# Altium PCB PCB.PcbDoc
Units mm, origin at the board's own origin, x right, y up, seen from the top; angles counter-clockwise.
Board outline 152.4 x 101.6 mm, 2 copper layers (Top Layer, Bottom Layer); 16 components, 10 nets, 35 pads, 0 vias.
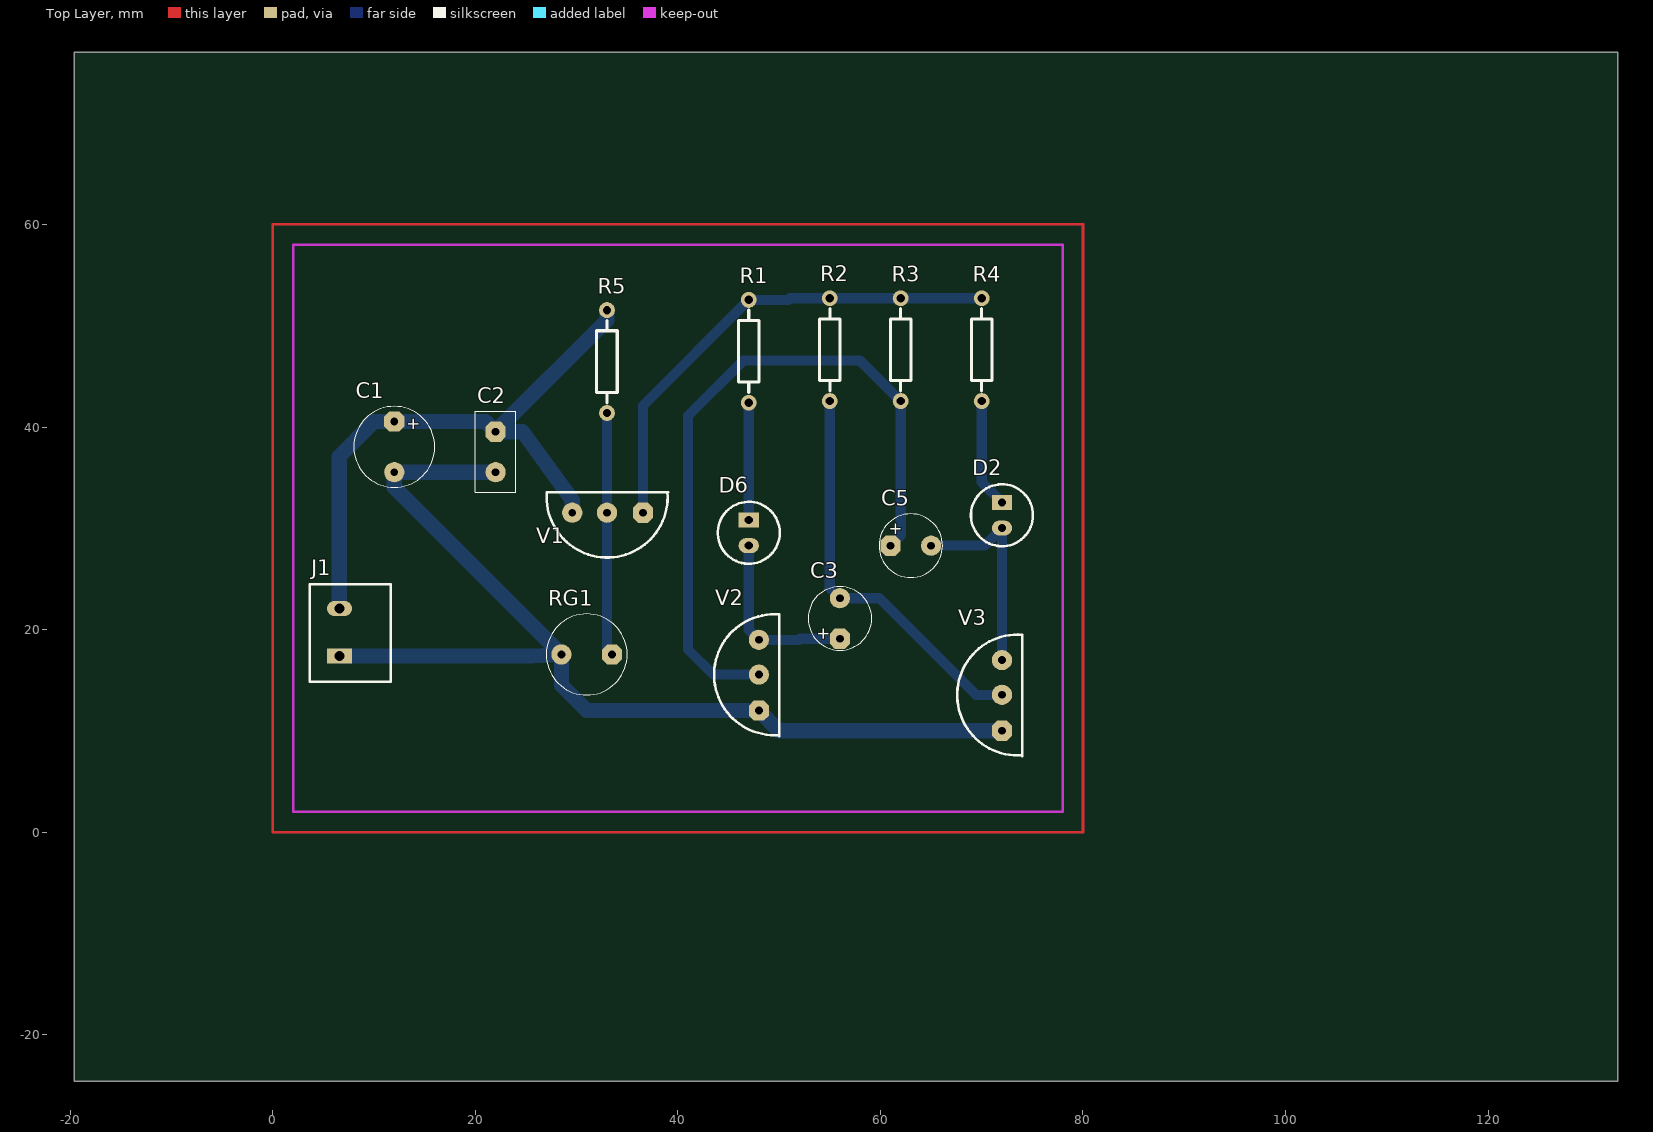
[diagram p0: Top Layer view]
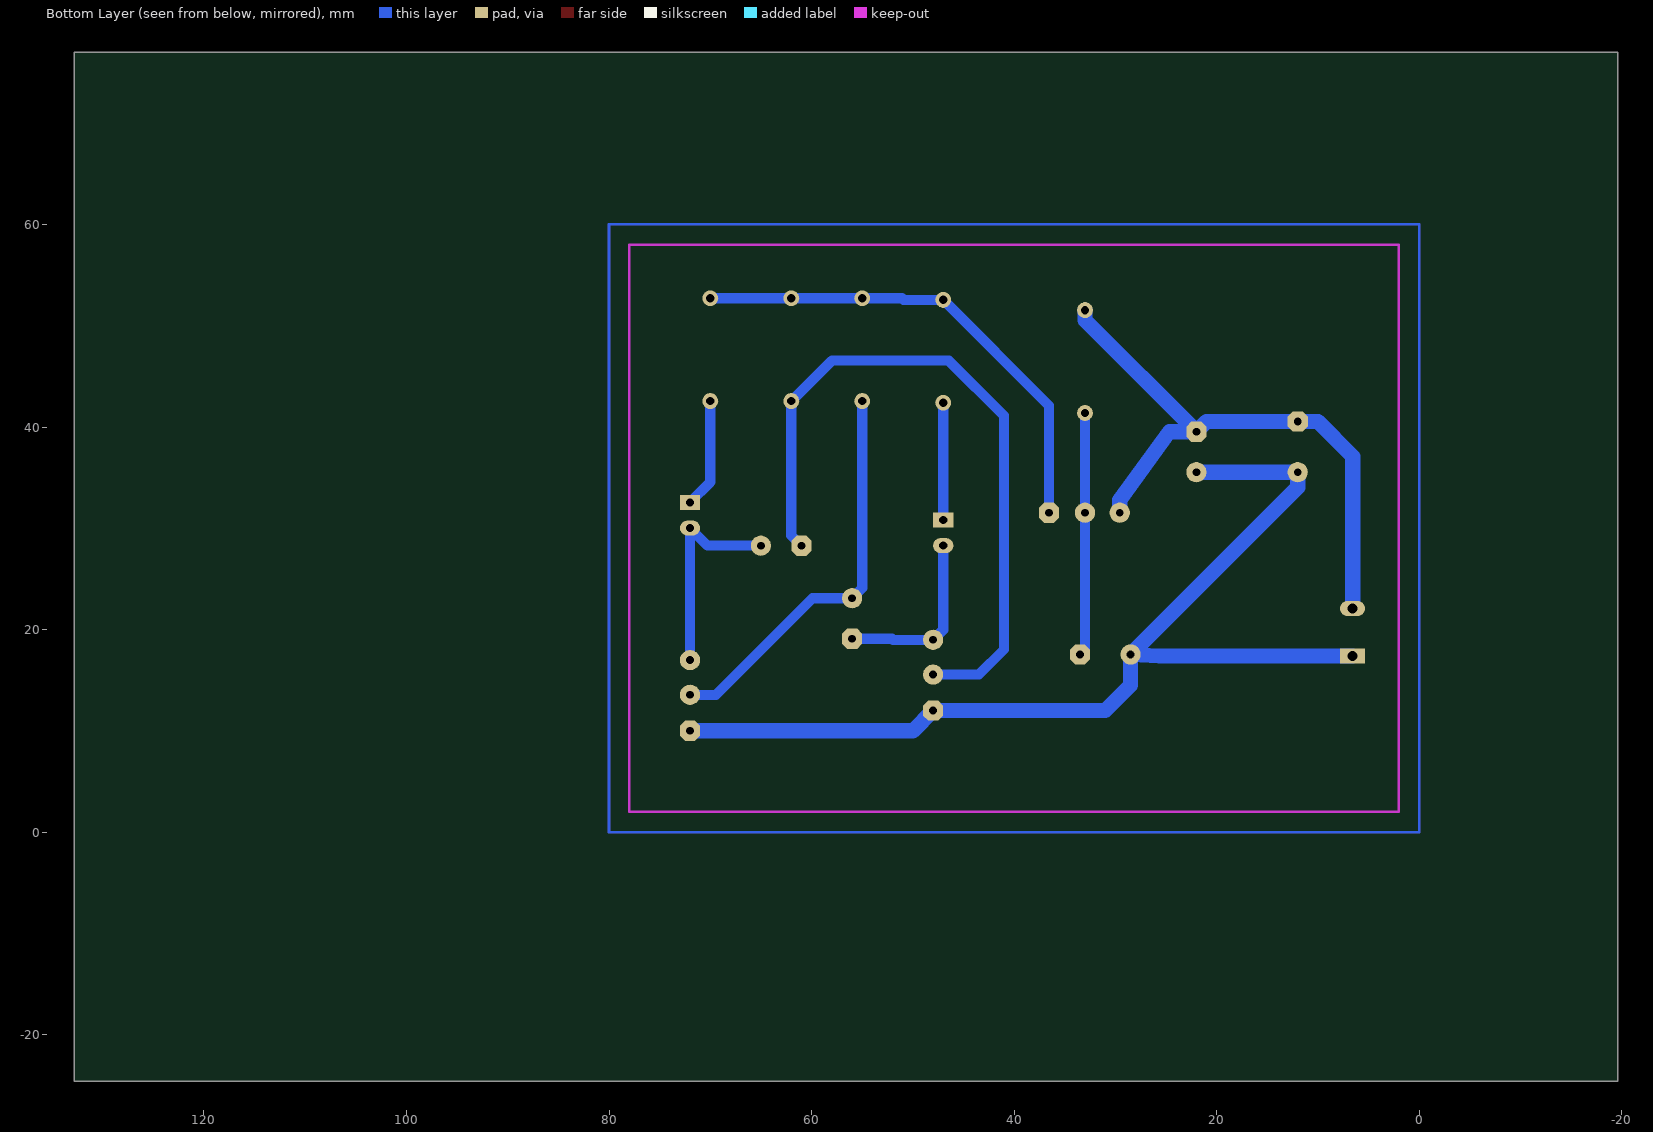
[diagram p1: Bottom Layer view, seen from below]

## Layer stack, top to bottom
Top Solder: solder mask 0.0102, Solder Resist, Dk 3.5
Top Layer: signal copper 0.0356
Dielectric 1: dielectric 0.32, FR-4, Dk 4.8
Bottom Layer: signal copper 0.0356
Bottom Solder: solder mask 0.0102, Solder Resist, Dk 3.5

## Board outline
-19.6,-24.6 132.8,-24.6 132.8,77 -19.6,77

## Design rules (kind name [scope] priority, off if disabled: settings)
Clearance [All] p1: gap=0.254 ignorepadtopadclearanceinfootprint=FALSE except(0: Arc-Hole Track-Hole SMDPad-Hole THPad-Hole Via-Hole Fill-Hole Poly-Hole Region-Hole Text-Hole)
PolygonConnect [All] p1: connectstyle=Relief reliefconductorwidth=0.254 reliefentries=4 polygonreliefangle="90 Angle" airgapwidth=0.254
RoutingVias [All] p1: holewidth=0.711 width=1.27 viastyle="Through Hole" minholewidth=0.711 minwidth=1.27 maxholewidth=0.711 maxwidth=1.27
SolderMaskExpansion [All] p1: expansion=0.102
Width Width_1 [InNet('GND')] p1: maxlimit=1.5 minlimit=0.254 preferedwidth=1.5 toplayer_maxwidth=0.254 toplayer_prefwidth=0.254 bottomlayer_minwidth=1.5 minimp=50.000000 maximp=50.000000 favimp=50.000000
Width Vin [InNet('VIN')] p2: maxlimit=1.5 minlimit=0.254 preferedwidth=1.5 toplayer_maxwidth=0.254 toplayer_prefwidth=0.254 bottomlayer_minwidth=1.5 minimp=50.000000 maximp=50.000000 favimp=50.000000
Width VOUT [InNet('VOUT')] p3: maxlimit=1.5 minlimit=1 preferedwidth=1.5 toplayer_maxwidth=1 toplayer_prefwidth=1 bottomlayer_minwidth=1.5 minimp=50.000000 maximp=50.000000 favimp=50.000000 checkconnectedcopper=TRUE
Width [All] p4: maxlimit=1 minlimit=1 preferedwidth=1 minimp=50.000000 maximp=50.000000 favimp=50.000000
30 further rules are at their usual default settings.

## Components (designator, comment, footprint, x,y, rotation, side; value= is the part's Value field where it differs from the comment)
C1 "100uf" RB5/8 12,40.54 r270 top
C2 "0.1uf" RAD4 22,39.54 r270 top
C3 "10uF/25V" RB4/5 56,19.096 r90 top
C5 "10uF/25V" RB4/5 61,28.286 r0 top
D2 "LED0" LED-0 72,31.286 r270 top
D6 "LED0" LED-0 47,29.556 r270 top
J1 "CON2" HDR1X2 9,19.54 r90 top
R1 "510" AXIAL0.4 47,42.396 r90 top
R2 "33k" AXIAL0.4 55,42.556 r90 top
R3 "33k" AXIAL0.4 62,42.556 r90 top
R4 "510" AXIAL0.4 70,42.556 r90 top
R5 "100k" AXIAL0.4 33,41.38 r90 top
RG1 "RG" RB5/8-D 31,17.54 r180 top
V1 "9013" T3-111 36.556,31.54 r180 top
V2 "9013" T3-111 48,12 r90 top
V3 "9013" T3-111 72,10 r90 top

## Footprints (in the part's own frame and the unit in brackets; to place one, negate y for a bottom-side part, rotate by r counter-clockwise, add the part's x,y. Pads: shape width x height; smd on the part's side, far side on the other; paste and mask are expansions set on the pad)
AXIAL0.4 [mil]
  round 62 hole 32: 1(0,0) 2(400,0)
  silkscreen extent 40,-40 360,40
HDR1X2 [mm]
  rect 1.5x2.5 hole 1: 1(-2.159,2.413)
  oval 1.5x2.5 hole 1: 2(2.54,2.413)
  silkscreen extent -4.7,-2.67 4.95,5.33
LED-0 [mm] "LED; 2 Leads"
  rect 1.5x2 hole 0.8: 1(-1.27,0)
  oval 1.5x2 hole 0.8: 2(1.27,0)
  silkscreen extent -3.06,-3.05 3.06,3.06
RAD4 [mm]
  oct 2x2 hole 0.762: 1(0,0)
  round 2 hole 0.762: 2(4,0)
  silkscreen extent -2,-2 6,2
RB4/5 [mm]
  oct 2x2 hole 0.762: 1(0,0)
  round 2 hole 0.762: 2(4,0)
  silkscreen extent -1.14,-3.14 5.14,3.14
RB5/8 [mm]
  oct 2x2 hole 0.762: 1(0,0)
  round 2 hole 0.762: 2(5,0)
  silkscreen extent -1.5,-4 6.5,4
RB5/8-D [mm]
  oct 2x2 hole 0.762: 1(-2.5,0)
  round 2 hole 0.762: 2(2.5,0)
  silkscreen extent -4,-4 4,4
T3-111 [mm]
  oct 2x2 hole 0.762: 1(0,0)
  round 2 hole 0.762: 2(3.556,0) 3(6.985,0)
  silkscreen extent -2.51,-2 9.51,4.42

## Part data
C1: library part ELECTRO2, "Electrolytic Capacitor"
C2: library part CAP, "Capacitor"
C3 C5: library part ELECTRO2_1, "Electrolytic Capacitor"
D2 D6: "Typical INFRARED GaAs LED", LatestRevisionDate=08-Jul-2005, LatestRevisionNote="Mech Layer 1 removed.", PackageDescription="LED; 2 Leads", PackageReference=LED-0, Published=8-Jun-2000, Publisher="Altium Limited"
J1: library part CON2_5, "Connector"
R1 R2 R3 R4 R5: library part RES2
V1 V2 V3: library part NPN_111, "NPN Transistor"

## Nets (pads, with @x,y where several pads share a name; then routed paths per layer and width w, separated by ;. In a path a pad name is that pad's centre, name@x,y a point inside that pad or via, vN(x,y) a via of type N, cw(c..) or ccw(c..) an arc to the next point about the centre after c; other vN are vias at no path point)
GND: C1.2 C2.2 J1.1 RG1.2 V2.1 V3.1 | length 105.2
  Bottom Layer w1.5: J1.1 25.659,17.381 RG1.2 ; C2.2 16.976,35.54 C1.2 12,34.04 RG1.2 ; V3.1 50,10 V2.1 31,12 28.5,14.5 RG1.2
NetC3_1: C3.1 D6.2 V2.3 | length 17.8
  Bottom Layer w1: D6.2 47,19.985 V2.3 51.939,18.985 52.05,19.096 C3.1
NetC3_2: C3.2 R2.1 V3.2 | length 39.8
  Bottom Layer w1: R2.1 55,24.096 C3.2 59.904,23.096 69.444,13.556 V3.2
NetC5_1: C5.1 R3.1 V2.2 | length 70.7
  Bottom Layer w1: V2.2 43.484,15.556 41,18.04 41,41.112 46.444,46.556 58,46.556 R3.1 62,29.286 C5.1
NetC5_2: C5.2 D2.2 V3.3 | length 20.7
  Bottom Layer w1: C5.2 70.27,28.286 D2.2 V3.3
NetD2_1: D2.1 R4.1 | length 10.8
  Bottom Layer w1: R4.1 70,34.556 D2.1
NetD6_1: D6.1 R1.1 | length 11.6
  Bottom Layer w1: D6.1 R1.1
NetR1_2: R1.2 R2.2 R3.2 R4.2 V1.1 | length 48.4
  Bottom Layer w1: V1.1 36.556,42.112 R1.2 50.897,52.556 51.057,52.716 R2.2 R3.2 R4.2
NetR5_1: R5.1 RG1.1 V1.2 | length 24
  Bottom Layer w1: R5.1 V1.2 33,18.04 RG1.1
VIN: C1.1 C2.1 J1.2 R5.2 V1.3 | length 61.1
  Bottom Layer w1.5: J1.2 6.562,22.08 6.562,37.102 10,40.54 C1.1 21,40.54 C2.1 ; V1.3 29.571,32.788 24.662,39.54 C2.1 ; R5.2 33,50.54 C2.1

## Keep-outs
Keep-Out Layer:
  lines w0.254: 2,2 2,58 78,58 78,2 2,2

## Other copper
Multi-Layer:
  lines w0.254: 0,0 0,60 80,60 80,0 0,0

## Text inside footprints (layer, text, board x,y; h text height)
C1: Top Overlay "+" at 13.4,40.94 h1.2 r270
C3: Top Overlay "+" at 54.9,18.896 h1.2 r90
C5: Top Overlay "+" at 60.8,29.386 h1.2